# Altium PCB 接收头.PcbDoc
Units mil, origin at the board's own origin, x right, y up, seen from the top; angles counter-clockwise.
Board outline 1173.75 x 565.83 mil, 2 copper layers (Top Layer, Bottom Layer); 42 components, 26 nets, 116 pads, 44 vias.
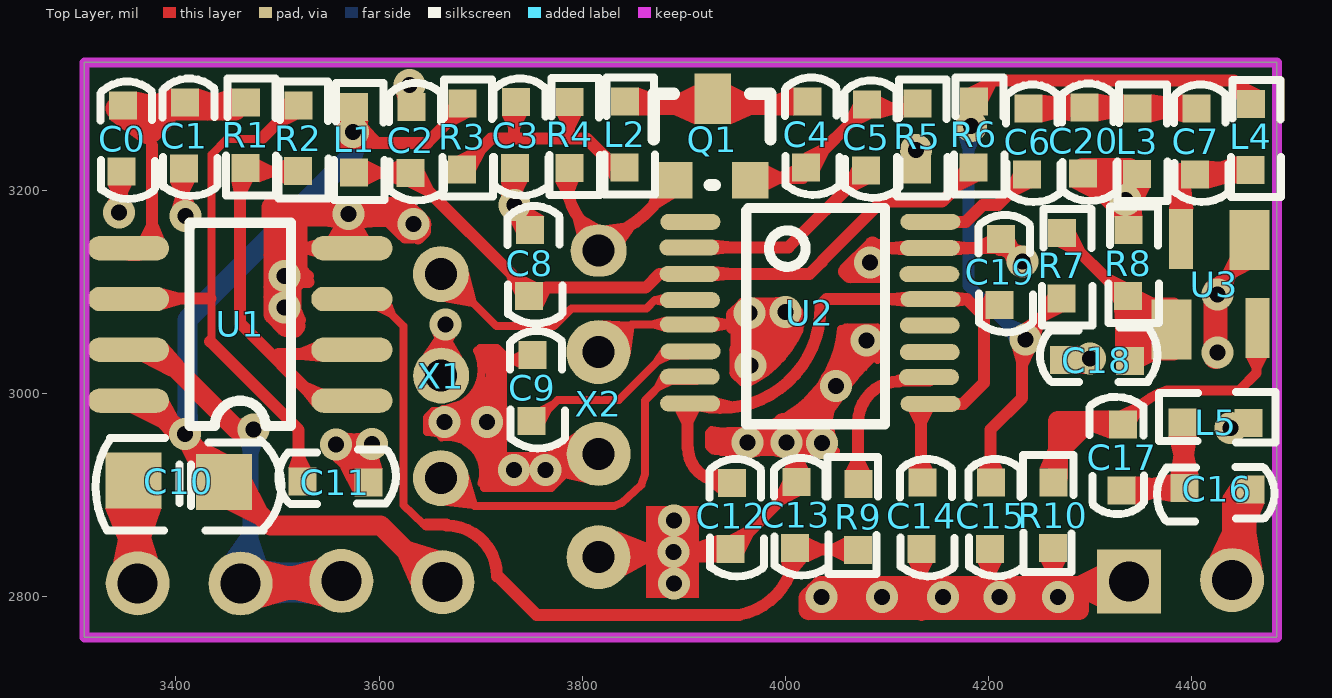
[diagram p0: Top Layer view]
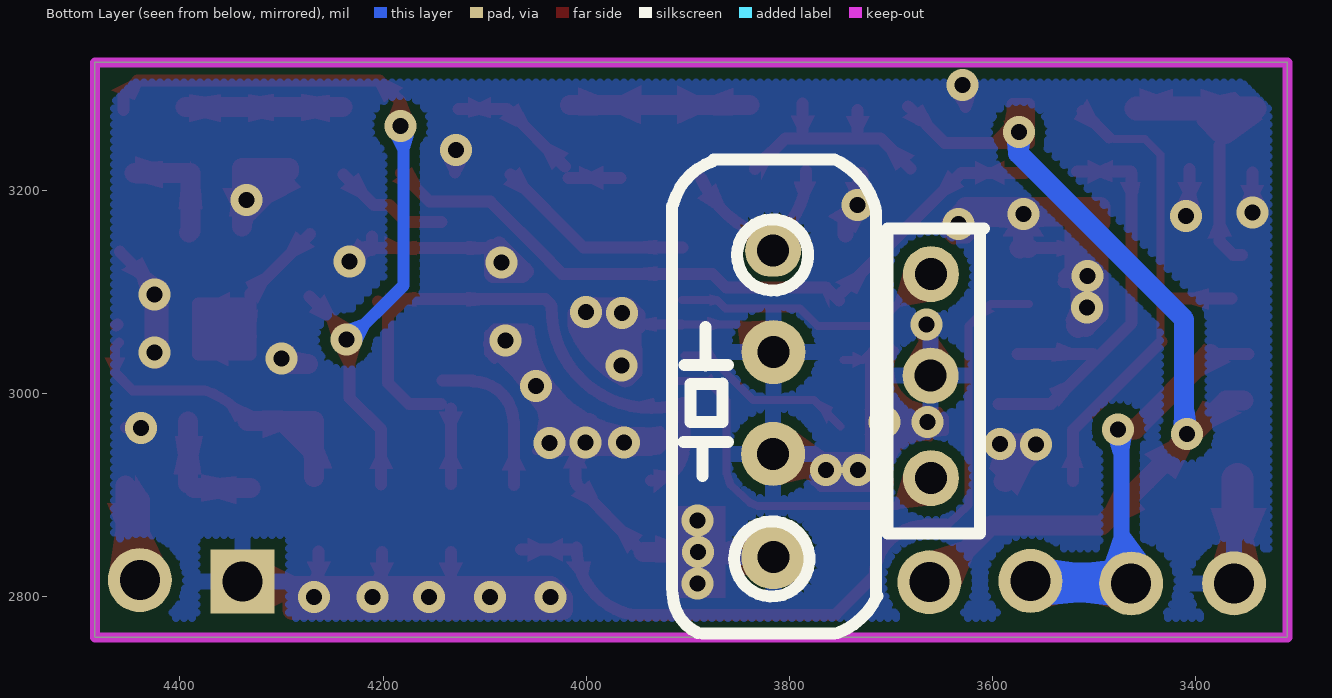
[diagram p1: Bottom Layer view, seen from below]

## Layer stack, top to bottom
Top Solder: solder mask 0.4, Solder Resist, Dk 3.5
Top Layer: signal copper 1.4
Dielectric 1: dielectric 12.6, FR-4, Dk 4.8
Bottom Layer: signal copper 1.4
Bottom Solder: solder mask 0.4, Solder Resist, Dk 3.5

## Board outline
3310,2760 3310,3325.83 4483.75,3325.83 4483.75,2760

## Design rules (kind name [scope] priority, off if disabled: settings)
Clearance [All] p1: gap=10 ignorepadtopadclearanceinfootprint=FALSE except(0: Arc-Hole Track-Hole SMDPad-Hole THPad-Hole Via-Hole Fill-Hole Poly-Hole Region-Hole Text-Hole)
PolygonConnect [All] p1: connectstyle=Relief reliefconductorwidth=10 reliefentries=4 polygonreliefangle="90 Angle" airgapwidth=10
RoutingVias [All] p1: holewidth=28 width=50 viastyle="Through Hole" minholewidth=28 minwidth=50 maxholewidth=28 maxwidth=50
SolderMaskExpansion [All] p1: expansion=4
Width [All] p1: maxlimit=10 minlimit=10 preferedwidth=10
30 further rules are at their usual default settings.

## Components (designator, comment, footprint, x,y, rotation, side; value= is the part's Value field where it differs from the comment)
C0 "" C1 3352.5,3279.17 r0 top
C1 "" C1 3413.75,3282.08 r0 top
C2 "" C1 3636.67,3277.75 r0 top
C3 "" C1 3739.58,3282.5 r0 top
C4 "" C1 4026.25,3283.33 r0 top
C5 "" C1 4085,3280.42 r0 top
C6 "" C1 4243.75,3276.17 r0 top
C7 "" C1 4409.17,3276.42 r0 top
C8 "" C1 3753.33,3156.67 r0 top
C9 "" C1 3755.83,3033.75 r0 top
C10 "" C0805 3370.83,2920.25 r0 top
C11 "" C1 3528.75,2917.92 r90 top
C12 "" C1 3951.88,2907.71 r0 top
C13 "" C1 4015.42,2908.75 r0 top
C14 "" C1 4139.58,2907.92 r0 top
C15 "" C1 4207.08,2907.92 r0 top
C16 "" C1 4453.54,2901.04 r270 top
C17 "" C1 4326.25,2908.75 r180 top
C18 "" C1 4278.33,3037.71 r90 top
C19 "" C1 4216.67,3148 r0 top
C20 "" C1 4298.75,3277.17 r0 top
L1 "" R0603 3578.75,3281.83 r0 top
L2 "" R0603 3845,3287.08 r0 top
L3 "" R0603 4349.58,3280.42 r0 top
L4 "" R0603 4461.25,3284.58 r0 top
L5 "" R0603 4391.25,2974.58 r90 top
Q1 "" SOT-23 3890.42,3210 r0 top
R1 "" R0603 3472.08,3286.25 r0 top
R2 "" R0603 3523.75,3283.33 r0 top
R3 "" R0603 3685.42,3285 r0 top
R4 "" R0603 3790.83,3286.67 r0 top
R5 "" R0603 4132.92,3285 r0 top
R6 "" R0603 4188.75,3287.08 r0 top
R7 "" R0603 4275.42,3157.92 r0 top
R8 "" R0603 4340.83,3160.42 r0 top
R9 "" R0603 4068.33,2846.25 r180 top
R10 "" R0603 4260.42,2847.92 r180 top
U1 "" SO-8 3573.33,2992.92 r180 top
U2 "" U0 3907.92,3166.25 r0 top
U3 "" U2 4457.5,3142.5 r0 top
X1 "" X0 3664.17,3113.75 r0 top
X2 "" X2 3821.67,3133.75 r0 top

## Footprints (in the part's own frame and the unit in brackets; to place one, negate y for a bottom-side part, rotate by r counter-clockwise, add the part's x,y. Pads: shape width x height; smd on the part's side, far side on the other; paste and mask are expansions set on the pad)
C1 [mm]
  rect 0.7x0.7 smd: 1(-0.148,-1.545) 2(-0.116,0.106)
  silkscreen extent -0.68,-2.23 0.69,0.7
C0805 [mm]
  rect 1.4x1.4 smd: 4(-0.323,-0.153) 5(1.947,-0.185)
  silkscreen extent -1.26,-1.4 3.38,0.91
R0603 [mm]
  rect 0.7x0.7 smd: 1(-0.079,0.005) 2(-0.09,-1.64)
  silkscreen extent -0.58,-2.32 0.68,0.6
SO-8 [mil]
  oval 80x24 smd: 1(0,0) 2(0,-50) 3(0,-100) 4(0,-150) 5(220,-150) 6(220,-100) 7(220,-50) 8(220,0)
  silkscreen extent 60,-175 160,25
SOT-23 [mil]
  rect 36x36 smd: 1(0,0) 2(75,0)
  rect 36x50 smd: 3(38,80)
  silkscreen extent -20,-5 95,85
U0 [mm]
  oval 1.5x0.4 smd: 1(-0.037,0.064) 2(-0.064,-0.572) 3(-0.058,-1.233) 4(-0.048,-1.889) 5(-0.053,-2.498) 6(-0.032,-3.17) 7(-0.053,-3.805) 8(-0.042,-4.471) 9(5.969,-4.482) 10(5.927,-3.815) 11(5.948,-3.191) 12(5.948,-2.519) 13(5.969,-1.868) 14(5.937,-1.244) 15(5.953,-0.587) 16(5.964,0.069)
  silkscreen extent 1.36,-5 4.83,0.41
U2 [mm]
  rect 1x1.5 smd: 7(-1.968,-2.021) 7(-0.021,0.212)
  rect 0.6x1.5 smd: 8(-1.725,0.243) 9(0.18,-1.99)
X0 [mm]
  round 1.4 hole 0.8: 9(-0.085,0.095) 10(-0.074,-2.445) 11(-0.085,-5.006)
X2 [mm]
  round 1.6 hole 0.8: 8(-0.143,-7.493) 9(-0.138,-4.911) 10(-0.148,-2.365)
  oval 1.4x1.3 hole 0.8: 11(-0.138,0.169)

## Free pads (board coordinates)
  rect 62.99x62.99 hole 39.37: 1(4338.33,2815)
  round 62.99 hole 39.37: 2(4439.58,2816.25) 3(3662.5,2814.17) 4(3562.92,2815.42) 5(3463.75,2812.92) 6(3362.5,2813.12)

## Via types
v1: diameter 31.5, hole 15.75, Top Layer to Bottom Layer, 44 vias

## Nets (pads, with @x,y where several pads share a name; then routed paths per layer and width w, separated by ;. In a path a pad name is that pad's centre, name@x,y a point inside that pad or via, vN(x,y) a via of type N, cw(c..) or ccw(c..) an arc to the next point about the centre after c; other vN are vias at no path point)
GND: C0.1 C1.1 C2.2 C3.1 C8.2 C9.2 C10.4 C11.1 C12.1 C13.2 C14.1 C15.1 C18.2 C19.2 C20.1 L3.2 L5.2 pad.1 pad.6 R5.2 R8.1 R10.1 U1.4 U2.5 U2.15 U3.7@4456.67,3150.83 X1.10 X2.8 X2.9 X2.10 | length 5957
  Top Layer w7.87: v1@3660.42,2982.5 3653.12,2982.5 3647.08,2976.46 3647.08,2962.08 3657.08,2962.08 v1@3661.04,2958.12 ; v1@3661.62,2956.56 cw(c3667.59,2922.08) 3700.97,2911.54 ; v1@3663.1,2984.73 ccw(c3662,3023.71) 3696.43,3042.04 ; X1.10@3663.33,3021.67 v1@3663.33,3068.54 ; 3699.58,3044.79 3716.04,3044.79 3727.92,3032.92 C9.2@3746.88,3032.92 ; 3703.12,2907.08 3769.79,2907.08 3775.73,2913.02 3785.21,2922.5 X2.9@3802.92,2922.5 ; 3721.88,3037.71 3721.88,2938.54 X2.9@3801.88,2938.54 ; X2.10@3826.25,3045.83 3848.33,3067.92 U2.5 ; 3926.25,2962.71 3924.58,2961.04 3924.58,2947.71 3928.54,2943.75 ; 3927.19,2963.95 ccw(c3945.17,3072.47) 4054.79,3063.39 ; 3931.25,2943.33 4004.5,2943.33 4009.58,2943.33 v1@4049.58,2943.33 ; 4059.17,3065 4090.42,3065 4096.67,3058.75 4096.67,3039.17 4090.42,3032.92
  Top Layer w10: 3494.17,3153.04 3494.17,3155 ; v1(3506.88,3115.42) 3506.88,3135.62 3509.79,3138.54 3509.79,3144.38 ; 3517.29,3160.42 3509.79,3160.42 ; U2.5 3947.5,3067.92 3953.54,3067.92 3950.83,3065.21 3950.83,3062.5 3950.83,3061.88 3950.83,3045.51 3951.84,3044.51 ; 3961.08,3051.63 3958.96,3051.63 3951.84,3044.51 ; v1(3965.42,3027.71) v1@3965.42,3030.92 ; 3494.17,3155 3494.17,3164.17 ; 3494.17,3155 3496.13,3153.04 ; 3494.17,3155 3496.13,3156.96 3497.29,3158.12 3507.08,3158.12 3509.38,3160.42 ; 3494.17,3164.17 3494.17,3168.96 3502.92,3168.96 3509.79,3175.83 3509.79,3164.17 ; 3494.17,3164.17 3496.13,3164.17 3509.79,3164.17 ; 3494.17,3164.17 3496.13,3162.21 3497.92,3160.42 3509.38,3160.42 ; 3496.13,3153.04 3509.15,3153.04 3509.79,3153.69 ; 3496.13,3153.04 3504.79,3144.38 3509.79,3144.38 ; 3509.38,3160.42 3509.79,3160.83 ; 3509.38,3160.42 3509.79,3160.42 ; 3509.79,3144.38 3509.79,3153.69 ; 3509.79,3153.69 3509.79,3160.42 ; 3509.79,3160.42 3509.79,3160.83 ; 3509.79,3160.83 3509.79,3164.17 ; 3951.84,3044.51 3952.59,3043.75 ; 3951.84,3044.51 3951.08,3043.75 3952.59,3043.75 ; 3952.59,3043.75 3960.57,3035.77 v1@3965.42,3030.92 ; 3952.59,3043.75 3964.38,3043.75 3965.42,3042.71 3965.42,3040.62 v1@3965.42,3030.92
  Top Layer w11.81: v1@3344.58,3172.5 C0.1@3344.58,3217.5 ; v1@3406.25,3173.33 C1.1@3406.25,3220.83 ; v1@3509.79,3078.12 3509.79,3138.54 ; v1@3517.29,3114.17 3517.29,3160.42 3517.29,3176.88 ; 3517.92,3170.42 3523.75,3170.42 ; 3522.29,3072.08 3517.71,3076.67 3517.71,3103.96 3523.54,3109.79 3530.42,3109.79 ; 3522.92,3171.46 3523.75,3171.46 ; 3527.5,3142.92 U1.4@3565.6,3142.92 ; 3530,3115.42 3523.75,3121.67 3523.75,3170.42 ; v1@3557.5,3170.42 3523.75,3170.42 ; v1@3573.12,3171.46 3570,3171.46 3523.75,3171.46 ; v1@3583.12,3169.58 3609.37,3169.58 ; v1@3622.92,3169.58 3609.37,3169.58 ; v1@3623.12,3171.88 v1@3634.38,3160.62 ; C2.2@3626.67,3281.67 v1@3626.67,3307.92 ; 3628.75,3182.92 v1@3645.21,3166.46 ; 3630.21,3183.96 3645.21,3168.96 v1@3645.21,3166.46 ; v1@3638.33,3152.5 3645.21,3159.38 v1@3645.21,3165.62 ; 3931.67,2948.12 3931.67,2957.71 ; 3947.5,3064.17 3947.5,3067.92 3947.5,3077.5 3958.33,3088.33 4003.33,3088.33 4005.94,3085.73 4012.5,3079.17 4012.5,3066.25 ; C12.1@3949.58,2848.75 4009.88,2910.68 C13.2@4009.55,2912.7 ; 3950,3062.71 3950.21,3062.5 ; 3950.83,3043.75 3950.83,3020 3958.33,3012.5 ; v1@3954.79,3070.62 v1@4004.79,3070.62 ; v1@3956.04,3077.08 v1@4003.33,3077.08 ; v1@3957.5,3032.71 3960.57,3035.77 3965.42,3040.62 3974.38,3049.58 ; v1@3958.75,3020.83 3965.52,3027.6 v1@4005.83,3067.92 ; 3961.88,3062.08 3974.38,3049.58 ; 3961.97,3011.48 ccw(c3916.99,3105.26) 4011.85,3062.61 ; 3967.71,3045 3961.08,3051.63 3950.83,3061.88 3950.21,3062.5 ; v1@3969.17,3020.83 3999.17,3050.83 ; 3974.58,3049.38 3974.38,3049.58 ; 3977.08,3062.5 3950.83,3062.5 3950.21,3062.5 ; 3989.17,3064.38 3974.38,3049.58 ; v1(4001.04,2951.88) v1@4003.49,2949.42 ; v1@4004.5,2943.33 v1@4003.49,2949.42 ; C13.2 4010.83,2942.08 4009.58,2943.33 v1@4003.49,2949.42 ; v1@4080.42,3054.17 4079.05,3052.25 4047.73,3008.41 4047.08,3007.5 4036.44,2951.01 4036.25,2950 4036.19,2950 v1@4003.09,2951.9 ; v1@4091.25,3138.33 v1@4092.71,3138.33 ; 4092.71,3143.96 4093.75,3142.92 4210.83,3142.92 C19.2@4210.83,3141.25 ; R5.2@4129.17,3217.5 v1@4129.17,3243.33 ; 4133.33,2810.42 C14.1@4133.33,2843.75 ; 4134.17,2782.08 4134.17,2786.67 4134.17,2799.58 4134.17,2810.42 ; v1@4200,2795.42 4200,2799.58 v1@4200,2810.42 ; v1@4201.25,2810.42 C15.1@4201.25,2843.75 ; C19.2@4210.83,3154.58 4210.83,3143.96 4217.71,3143.96 v1@4235.83,3125.83 ; v1@4260,2787.92 4260,2799.58 v1@4260,2810.42 ; v1@4263.54,2810.42 R10.1@4263.54,2844.58 ; v1@4421.67,3102.08 U3.7@4459.17,3139.58 ; v1@4434.17,2966.25 L5.2@4453.33,2966.25 ; 3523.75,3170.42 3523.75,3171.46 ; 3609.37,3169.58 3623.02,3155.94 3625.42,3153.54 3633.12,3153.54 v1@3645.21,3165.62 ; v1@3645.21,3165.62 3645.62,3166.04 v1@3645.21,3166.46 ; v1@3645.21,3165.62 v1@3645.21,3166.46 ; v1@4003.09,2951.9 4003.03,2952.2 4002.92,2952.92 4001.08,2952.98 3963.33,2954.17 4001.05,2952.01 v1@4003.09,2951.9 ; v1@4003.09,2951.9 v1@4003.49,2949.42
  Top Layer w15.75: C3.1@3730,3215 3730,3185 3745,3170 C8.2@3745,3156.25 ; v1@4072.29,3123.33 4080.62,3131.67 v1@4087.5,3138.54 ; v1@4082.71,3120.62 v1@4086.67,3124.58 ; 4085.83,3146.46 4059.58,3120.21 4063.3,3116.49 4091.9,3116.49 4092.71,3117.29 v1@4092.71,3138.33 ; 4090.21,3143.96 4092.71,3143.96
  Top Layer w19.68: 3508.33,3065.42 3496.13,3077.62 3496.13,3153.04 3496.13,3156.96 3496.13,3162.21 3496.13,3164.17 3496.13,3167 3494.17,3168.96 3494.17,3183.33 3627.08,3183.33 ; 3516.25,3064.58 3517.92,3066.25 ; v1@3555,2950.42 3587.5,2950.42 C11.1@3587.5,2915.42 ; v1@3557.08,2945.83 C11.1@3587.5,2915.42 ; U1.4@3565,3143.12 U1.4@3565.6,3142.92 ; v1@3576.62,3174.19 3577.67,3177 v1@3577.5,3180.83 ; C11.1@3587.5,2912.92 C11.1@3587.5,2915.42 ; C11.1@3589.58,2913.33 C11.1@3587.5,2915.42 ; v1@3657.29,2972.5 v1@3695.62,2972.5 ; v1@3663.33,2966.67 3685.62,2966.67 ; 3680,2982.08 v1@3695.62,2982.08 ; 3695.62,2956.46 v1@3695.62,2972.5 ; 3695.62,2993.54 v1@3695.62,2982.08 ; v1@3698.75,2982.08 v1@3695.62,2982.08 ; v1@3700.21,2972.5 v1@3695.62,2972.5 ; 3705,2940.83 3705,3006.25 ; 3705.83,3034.38 3705.83,3038.75 ; 3711.25,2917.71 v1@3770.62,2917.71 ; 3714.79,3037.92 3714.79,2930 X2.9@3791.46,2930 ; X2.8@3824.17,2843.75 v1(3890,2843.75) C12.1@3943.75,2843.75 ; v1@3975,2958.33 v1@4013.75,2958.33 ; 3997.5,2970.83 4016.25,2970.83 ; 4012.71,2974.17 4036.67,2998.12 ; v1@4043.96,3013.33 4064.58,3033.96 ; v1@4045.83,2799.58 v1(4095,2799.58) 4134.17,2799.58 v1(4155,2799.58) 4200,2799.58 v1(4210.62,2799.58) 4260,2799.58 v1(4268.12,2799.58) 4285.83,2799.58 ; v1@4048.54,3005.42 v1@4091.67,3048.54 ; 4059.38,3036.67 4059.38,3047.29 ; 4061.67,3056.46 v1@4086.88,3056.46 ; 4065.62,3042.29 v1@4073.54,3050.21 ; C18.2@4274.17,3029.17 v1@4295,3029.17 ; 4289.17,2801.67 4289.17,2786.67 4134.17,2786.67 4022.92,2786.67 4022.92,2798.75 4028.75,2804.58 4029.58,2805.42 4034.58,2810.42 4134.17,2810.42 4200,2810.42 4260,2810.42 pad.1@4330,2810.42 ; C20.1@4292.5,3221.67 4338.75,3221.67 R8.1@4338.75,3164.17 ; C20.1@4292.92,3218.33 v1@4332.08,3179.17 ; 4317.92,3212.5 v1@4331.25,3199.17 ; v1@3695.62,2972.5 v1@3695.62,2982.08
  Top Layer w20: v1(3570,3176.67) 3570,3171.46 3570,3146.25 U1.4
  Top Layer w23.62: v1@4423.33,3035.83 v1@4423.33,3101.67
  Top Layer w31.5: pad.6@3359.17,2822.08 C10.4@3359.17,2915.83
  other v1: 4035.42,2799.58 3890.42,2813.12 3890.42,2875 3732.71,2924.79 3763.96,2924.79 3557.71,2949.79 3593.12,2950.21 4036.25,2951.04 3962.92,2951.67 4438.12,2966.04 3664.38,2971.67 3706.46,2971.88 4049.58,3007.08 4300,3034.38 4425.21,3040.42 4079.58,3051.88 3665.42,3067.92 3964.79,3079.17 4000.21,3080 3507.08,3084.38 4425.21,3097.29 4083.33,3128.96 4233.33,3130 3633.75,3166.67 3409.58,3174.58 3344.17,3177.92 3733.33,3185.42 4334.58,3190.42 4128.33,3239.38 3629.79,3303.54
NewNet1: C10.5 L1.1 pad.3 R3.1 U1.8 | length 1007.3
  Top Layer w11.81: v1@3573.75,3252.5 L1.1@3573.75,3276.67 ; v1@3580.83,3250.83 3580.83,3285 3564.58,3285 3564.58,3282.04 3564.58,3246.67 3647.5,3246.67 R3.1@3683.33,3282.5 ; v1@3581.67,3262.92 3595,3249.58
  Top Layer w19.68: U1.8 3370.42,2992.92 3406.04,2957.29 3448.94,2914.4 3493.33,2870 3601.67,2870 pad.3@3654.17,2817.5
  Bottom Layer w19.68: v1@3411.67,2958.75 3411.67,3072.92 3575,3236.25 v1@3575,3259.58
  other v1: 3408.96,2960.21 3574.17,3257.5
NewNet2: pad.4 pad.5 U1.7 | length 590.7
  Top Layer w11.81: U1.7@3348.33,3038.75 U1.7@3385.83,3038.75
  Top Layer w19.68: U1.7@3385.83,3038.75 3460,2964.58 v1(3476.67,2964.58)
  Top Layer w27.56: pad.5@3462.08,2810.42 pad.4@3561.67,2810.42
  Top Layer w31.5: pad.5@3464.58,2814.58 pad.4@3558.75,2814.58
  Bottom Layer w15.75: pad.5@3473.33,2815.42 v1@3473.33,2960.83
  Bottom Layer w39.37: pad.5@3463.75,2813.75 pad.4@3556.25,2813.75
NewNet3: C11.2 R2.1 U1.6 | length 511.1
  Top Layer w7.87: 3435,3053.33 3435,3235 3450.42,3250.42 3453.96,3250.42 ; 3455.21,3250.62 3480,3250.62
  Top Layer w11.81: U1.6@3365,3093.33 3434.17,3093.33 ; 3433.75,3051.25 3520.83,2964.17 C11.2@3520.83,2913.75 ; 3485.83,3252.08 R2.1@3511.67,3277.92
NewNet4: C0.2 C1.2 R1.1 U1.5 | length 281.6
  Top Layer w11.81: U1.5@3354.58,3136.25 3363.33,3136.25 3376.67,3149.58 3376.67,3244.17
  Top Layer w23.62: C0.2@3342.5,3280.42 R1.1@3458.33,3280.42 ; C0.2@3355,3273.75 3371.67,3257.08 ; 3374.17,3257.08 3388.33,3271.25
NewNet6: C13.1 R9.1 U1.3 | length 767.4
  Top Layer w7.87: U1.3@3564.58,3087.92 3602.29,3087.92 3623.96,3066.25 3623.96,2890.21 3643.54,2871.67
  Top Layer w11.81: 3646.67,2870.83 3666.25,2870.83 ; 3666.25,2870 cw(c3666.25,2820) 3716.25,2820 ; 3717.08,2820 3755,2782.08 3954.86,2782.08 ccw(c3942.12,2848.33) C13.1@4009.58,2848.33 ; C13.1@4013.33,2846.25 R9.1@4064.58,2846.25
NewNet7: R1.2 R2.2 U1.1 U1.2 | length 439.6
  Top Layer w11.81: R1.2@3463.33,3217.08 3463.33,3069.17 3542.92,2989.58 U1.1@3594.17,2989.58 ; R1.2@3463.75,3218.33 R2.2@3517.08,3218.33 ; 3501.25,3038.75 U1.2@3575.83,3038.75
NewNet8: Q1.1 R4.2 X2.11 | length 166
  Top Layer w11.81: R4.2@3783.9,3218.74 ccw(c3856.74,3213.84) X2.11@3816.33,3153.04 ; X2.11@3823.08,3153.69 ccw(c3790.03,3254.4) Q1.1@3887.17,3211.99
NewNet9: C4.1 C5.2 Q1.2 R5.1 | length 179.3
  Top Layer w11.81: Q1.2@3966.25,3212.08 C4.1@4017.5,3212.08 ; C4.1@4021.25,3223.33 4077.92,3280 R5.1@4125.83,3280
NewNet10: C4.2 L2.1 Q1.3 | length 176.7
  Top Layer w19.68: L2.1@3839.58,3283.75 C4.2@4016.25,3283.75
NewNet11: C5.1 U2.2 | length 198.9
  Top Layer w11.81: U2.2 4002.92,3143.75 C5.1@4074.58,3215.42
NewNet12: C2.1 C8.1 L1.2 R6.2 U2.3 | length 712.9
  Top Layer w11.81: L1.2@3568.33,3217.08 3630.83,3217.08 3630.92,3217 C8.1@3748.75,3099.17 ; C8.1@3751.25,3091.25 3764.17,3104.17 3862.5,3104.17 3876.04,3117.71 U2.3 4023.96,3117.71 4035.8,3129.55 4035.8,3130.06 4094.5,3188.75 4154.17,3188.75 R6.2@4182.5,3217.08
NewNet13: U2.4 X1.9 | length 276.1
  Top Layer w7.87: X1.9@3662.5,3119.17 3715.42,3066.25 3772.29,3066.25 3789.6,3083.56 3863.14,3083.56 3871.46,3091.88 U2.4
NewNet14: C9.1 U2.6 | length 182.5
  Top Layer w7.87: C9.1@3749.79,2967.5 3775.83,2993.54 3836.04,2993.54 3880,3037.5 U2.6@3903.33,3037.5
NewNet15: U2.7 X1.11 | length 363.3
  Top Layer w7.87: X1.11@3659.17,2924.17 3694.17,2889.17 3831.67,2889.17 3838.75,2892.29 3858.12,2909.79 3861.88,2921.25 3861.88,2993.12 3880.83,3012.08 U2.7@3912.5,3012.08
NewNet16: C12.2 C14.2 C19.1 U2.8 U2.9 U2.13 | length 658.7
  Top Layer w11.81: 3903.54,2946.04 U2.8@3903.54,2984.79 ; 3904.25,2946.04 ccw(c3936.25,2946.04) C12.2@3936.25,2914.04 ; U2.8@3905.09,2990.67 ccw(c3936.34,3083.56) 4034.31,3085.83 ; 4035.83,3088.33 4040.21,3092.71 U2.13 4178.54,3092.71 4191.25,3080 ; C14.2@4133.33,2911.04 U2.9@4133.33,2985.21 ; U2.9 4174.79,2989.79 4195.42,3010.42 4195.42,3080.83 C19.1@4205,3090.42
NewNet17: R9.2 U2.10 | length 154.1
  Top Layer w11.81: R9.2@4071.25,2910 4071.25,2971.25 ; 4071.67,2971.67 cw(c4111.67,2971.67) 4111.67,3011.67 ; 4111.67,3012.5 U2.10@4141.67,3012.5
NewNet18: C6.1 U2.16 | length 115.7
  Top Layer w11.81: U2.16 4177.71,3168.96 4194.17,3185.42 4209.17,3185.42 C6.1@4239.17,3215.42
NewNet19: C3.2 L2.2 R3.2 R4.1 | length 235.1
  Top Layer w11.81: R3.2@3680.83,3221.25 3710.42,3250.83 3804.17,3250.83 L2.2@3834.17,3220.83 ; 3732.92,3251.67 C3.2@3732.92,3278.75 ; 3787.08,3255.42 R4.1@3787.08,3285.42
NewNet20: C6.2 C7.2 C20.2 L3.1 | length 154.6
  Top Layer w19.68: C6.2@4240,3281.67 C7.2@4394.58,3281.67
NewNet21: C7.1 L4.2 U3.8 | length 114.1
  Top Layer w19.68: U3.8@4391.04,3158.54 4389.58,3160 4389.58,3217.08 L4.2@4444.58,3217.08
NewNet22: C18.1 R7.1 R8.2 U3.7@4380,3062.92 | length 294.2
  Top Layer w11.81: R7.1@4272.08,3156.67 4330.42,3098.33 4330.42,3038.33 4382.5,3038.33 4382.5,3088.33 R8.2@4332.92,3088.33
NewNet23: C17.1 R10.2 U3.9 | length 337.9
  Top Layer w10: C17.1@4332.93,2969.58 cw(c4398.58,2929.34) 4375.84,3002.9 ; 4377.5,3002.92 4446.43,3002.92 4463.83,3020.31 4463.83,3046.17 U3.9@4460,3050
  Top Layer w11.81: U3.9@4461.67,3067.92 U3.9@4462.92,3066.66
  Top Layer w19.68: R10.2@4268.33,2917.92 4268.33,2972.92 C17.1@4333.75,2972.92 ; 4271.25,2945 4296.25,2970
NewNet24: C16.1 C17.2 L5.1 | length 116.7
  Top Layer w19.68: C17.2@4330.83,2906.67 C16.1@4386.25,2906.67 ; C16.1@4392.08,2911.25 L5.1@4392.08,2972.5
NewNet25: C16.2 pad.2 | length 195.7
  Top Layer w19.68: pad.2@4435,2820 pad.2@4439.58,2824.58 ; pad.2 pad.2@4439.58,2824.58 ; pad.2@4439.58,2824.58 4439.58,2895 4453.75,2909.17 4453.75,2838.75 pad.2@4439.58,2824.58
NewNet26: C15.2 L4.1 R6.1 R7.2 | length 770.4
  Top Layer w11.81: v1@4183.33,3267.5 R6.1@4183.33,3288.33 ; R6.1@4187.08,3291.25 4203.75,3307.92 4441.67,3307.92 4455.83,3293.75 L4.1@4455.83,3279.17 ; C15.2@4202.08,2910.42 4202.08,2964.58 4232.92,2995.42 4232.92,3055.83 R7.2@4272.5,3095.42
  Bottom Layer w11.81: v1@4180,3265.42 4180,3106.25 v1@4236.67,3049.58
  other v1: 4236.25,3052.92 4182.92,3263.12
pads on no net: U2.1 U2.11 U2.12 U2.14

## Polygon pours and split planes (outlines as drawn)
GND on Bottom Layer "BottomLayer-No Net" (hatched 90Degree grid 7.87 track 7.87, remove dead copper, pour order 0): 4455,2771.25 4155,2771.25 3345,2771.25 3330,2786.25 3325,2791.25 3325,2836.25 3325,3276.25 3340,3291.25 3355,3306.25 3445,3306.25 4445,3306.25 4460,3291.25 4465,3286.25 4465,3256.25 4465,2781.25 4455,2771.25

## Keep-outs
Keep-Out Layer:
  the board outline again, w9.84

## Other copper
Top Layer:
  rectangle net GND: 4027.08,2977.92 4040.42,2997.92
  rectangle net GND: 4004.58,2949.17 4038.75,2980
  rectangle net GND: 3935,2938.33 4046.67,2959.58
  rectangle net GND: 3862.92,2798.75 3915,2889.17
  rectangle net NewNet22: 4335.42,3037.08 4383.33,3086.67